# Altium PCB TopBoard.PcbDoc
Units mm, origin at the board's own origin, x right, y up, seen from the top; angles counter-clockwise.
Board outline 100 x 80 mm, 4 copper layers (Top Layer, Internal Plane 1, Internal Plane 2, Bottom Layer); 27 components, 153 nets, 226 pads, 28 vias.
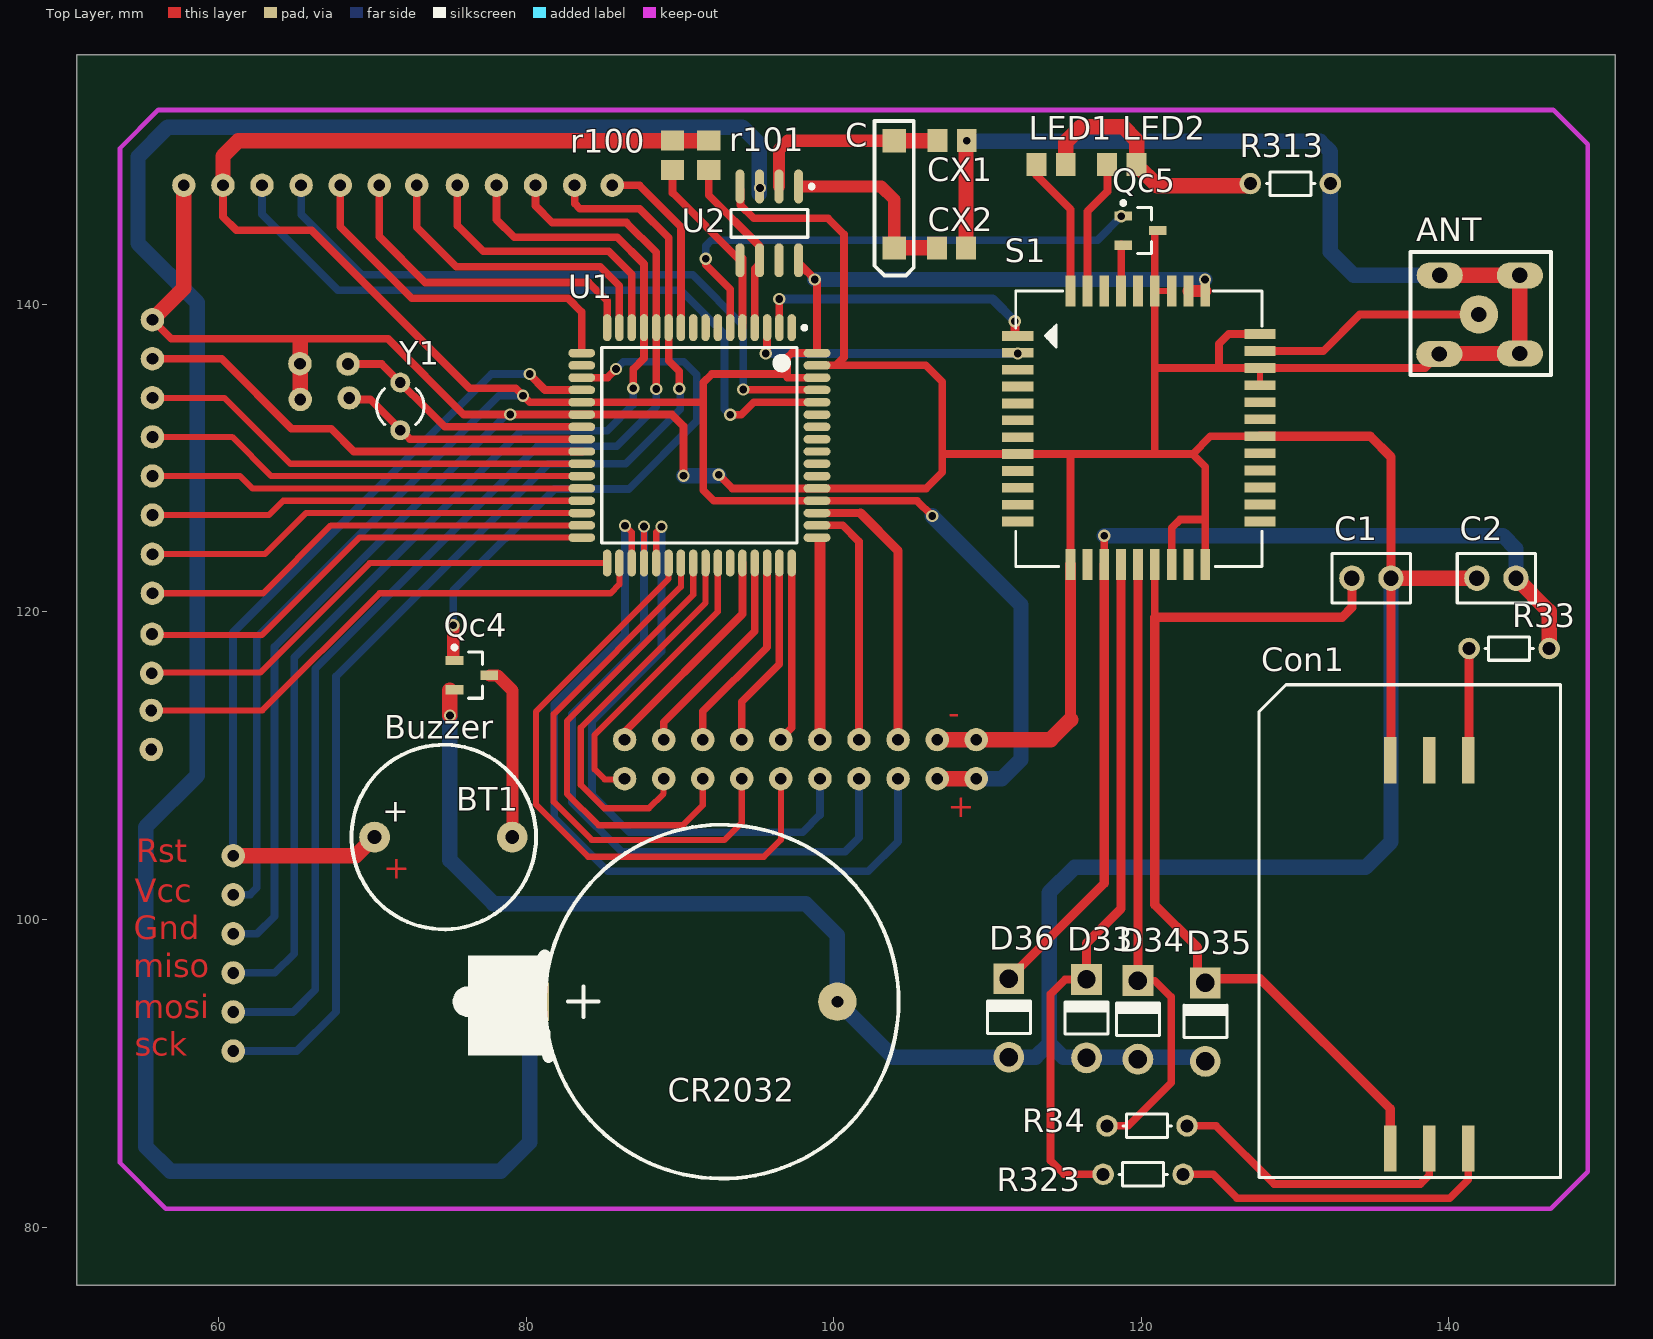
[diagram p0: Top Layer view]
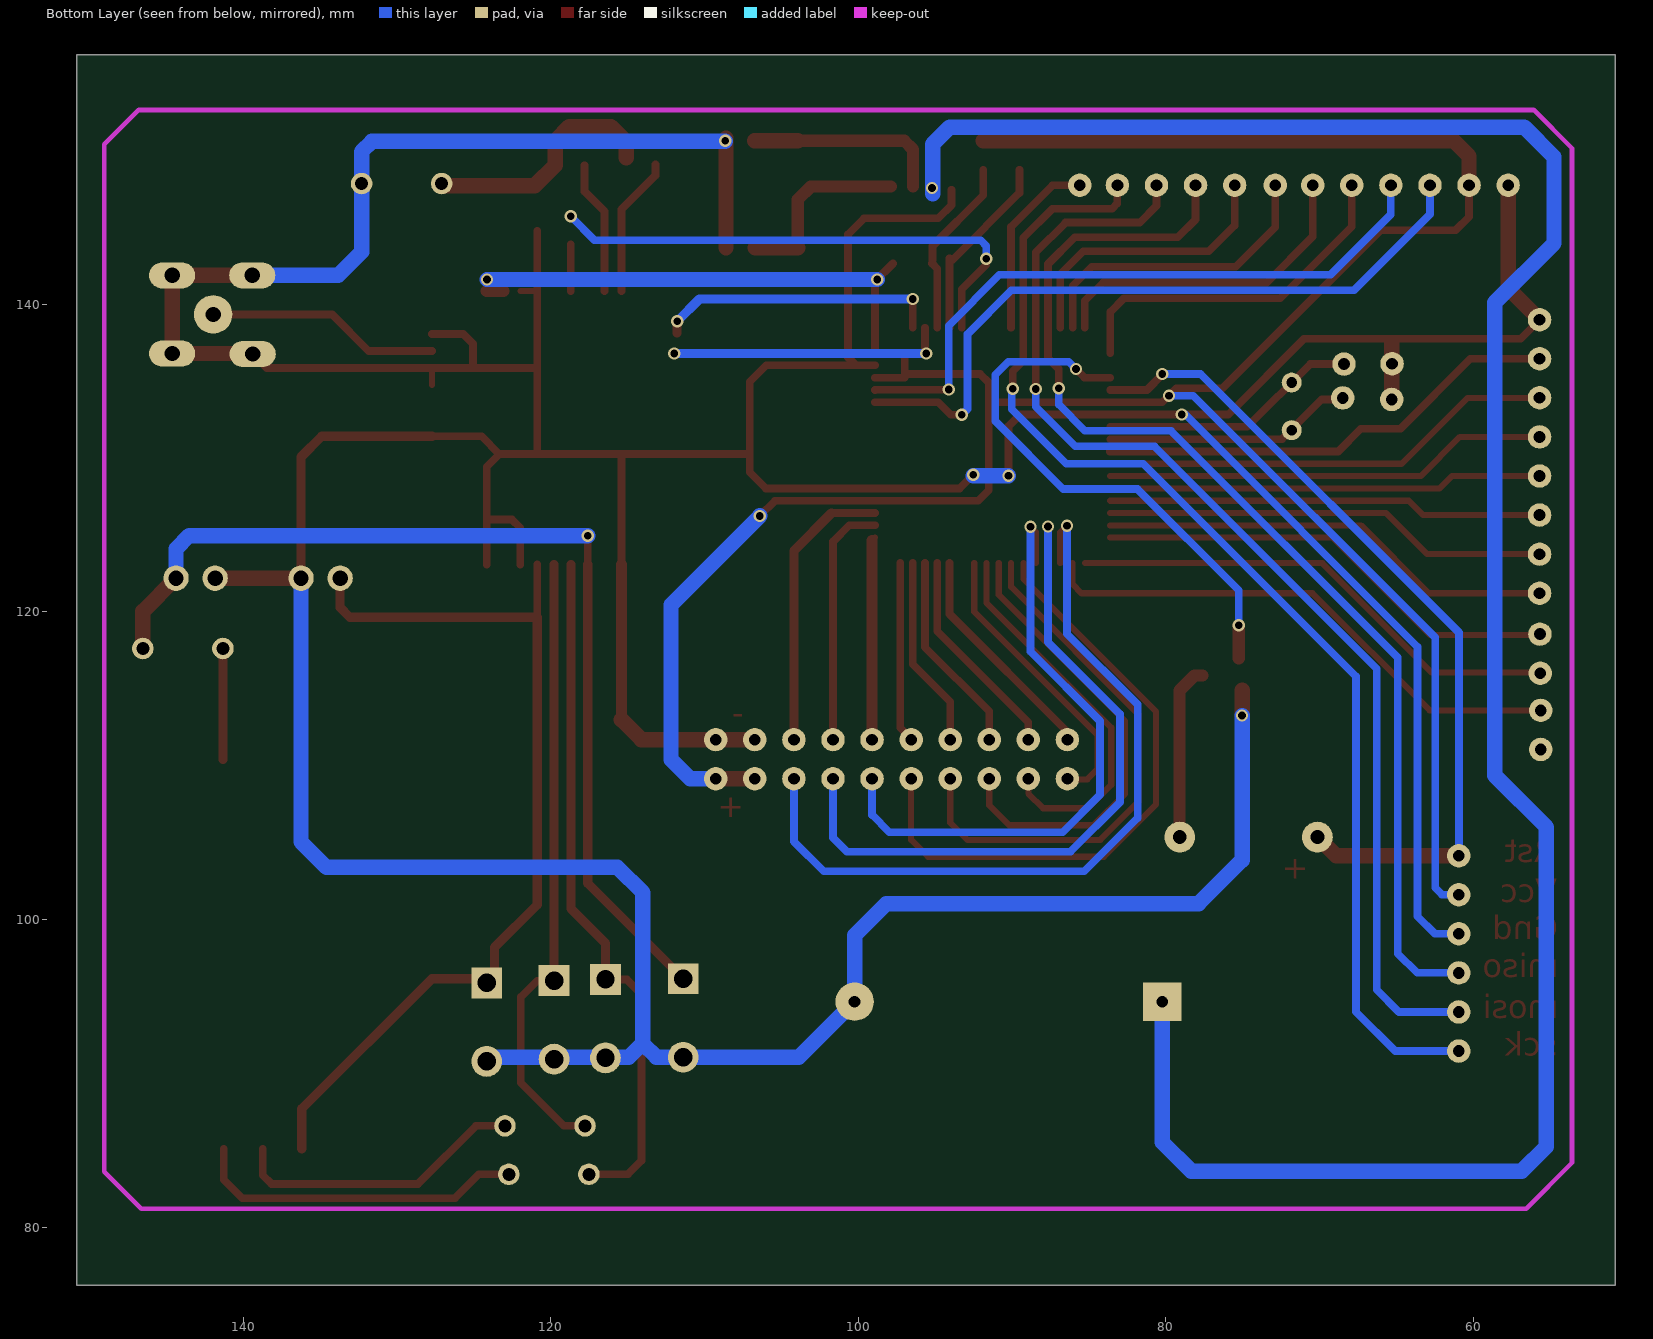
[diagram p1: Bottom Layer view, seen from below]
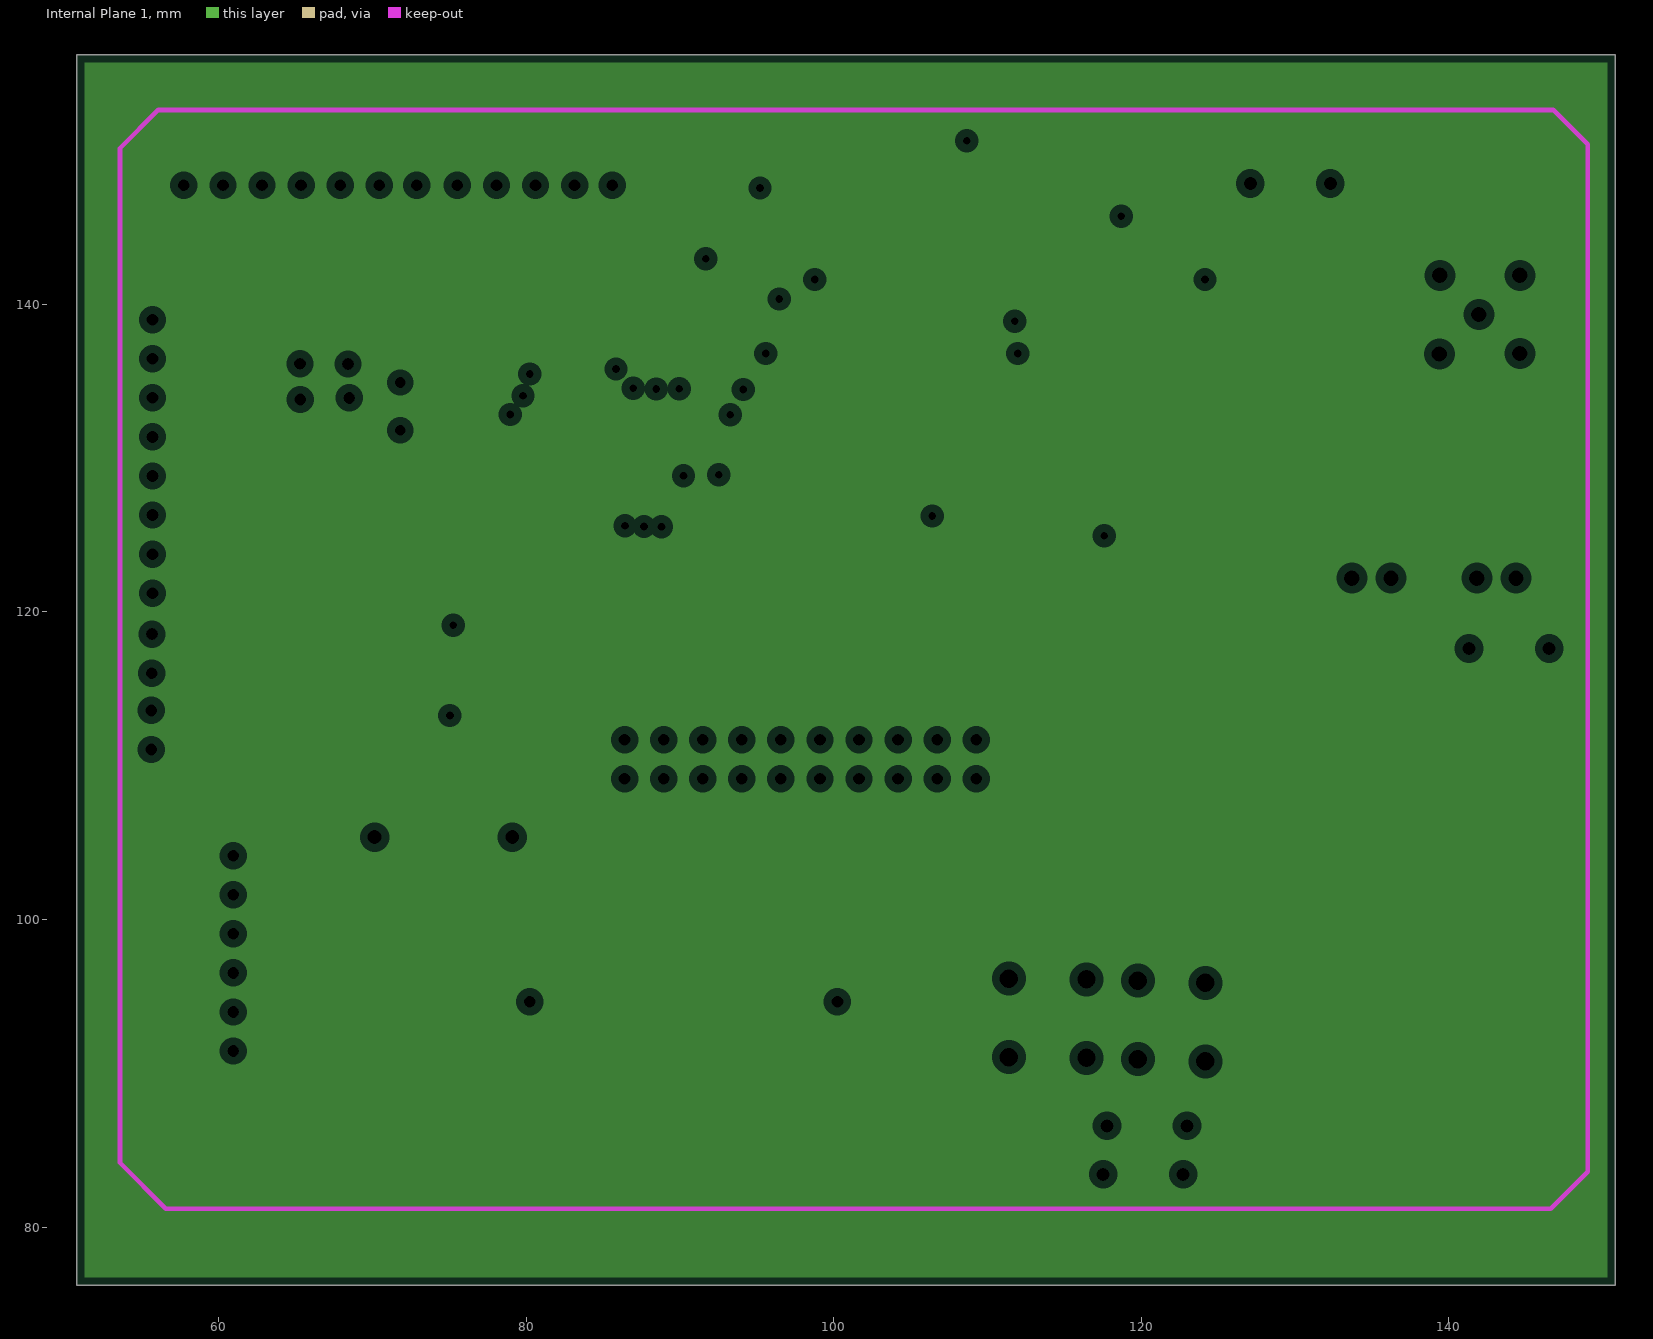
[diagram p2: Internal Plane 1, clearances drawn from the general rule]
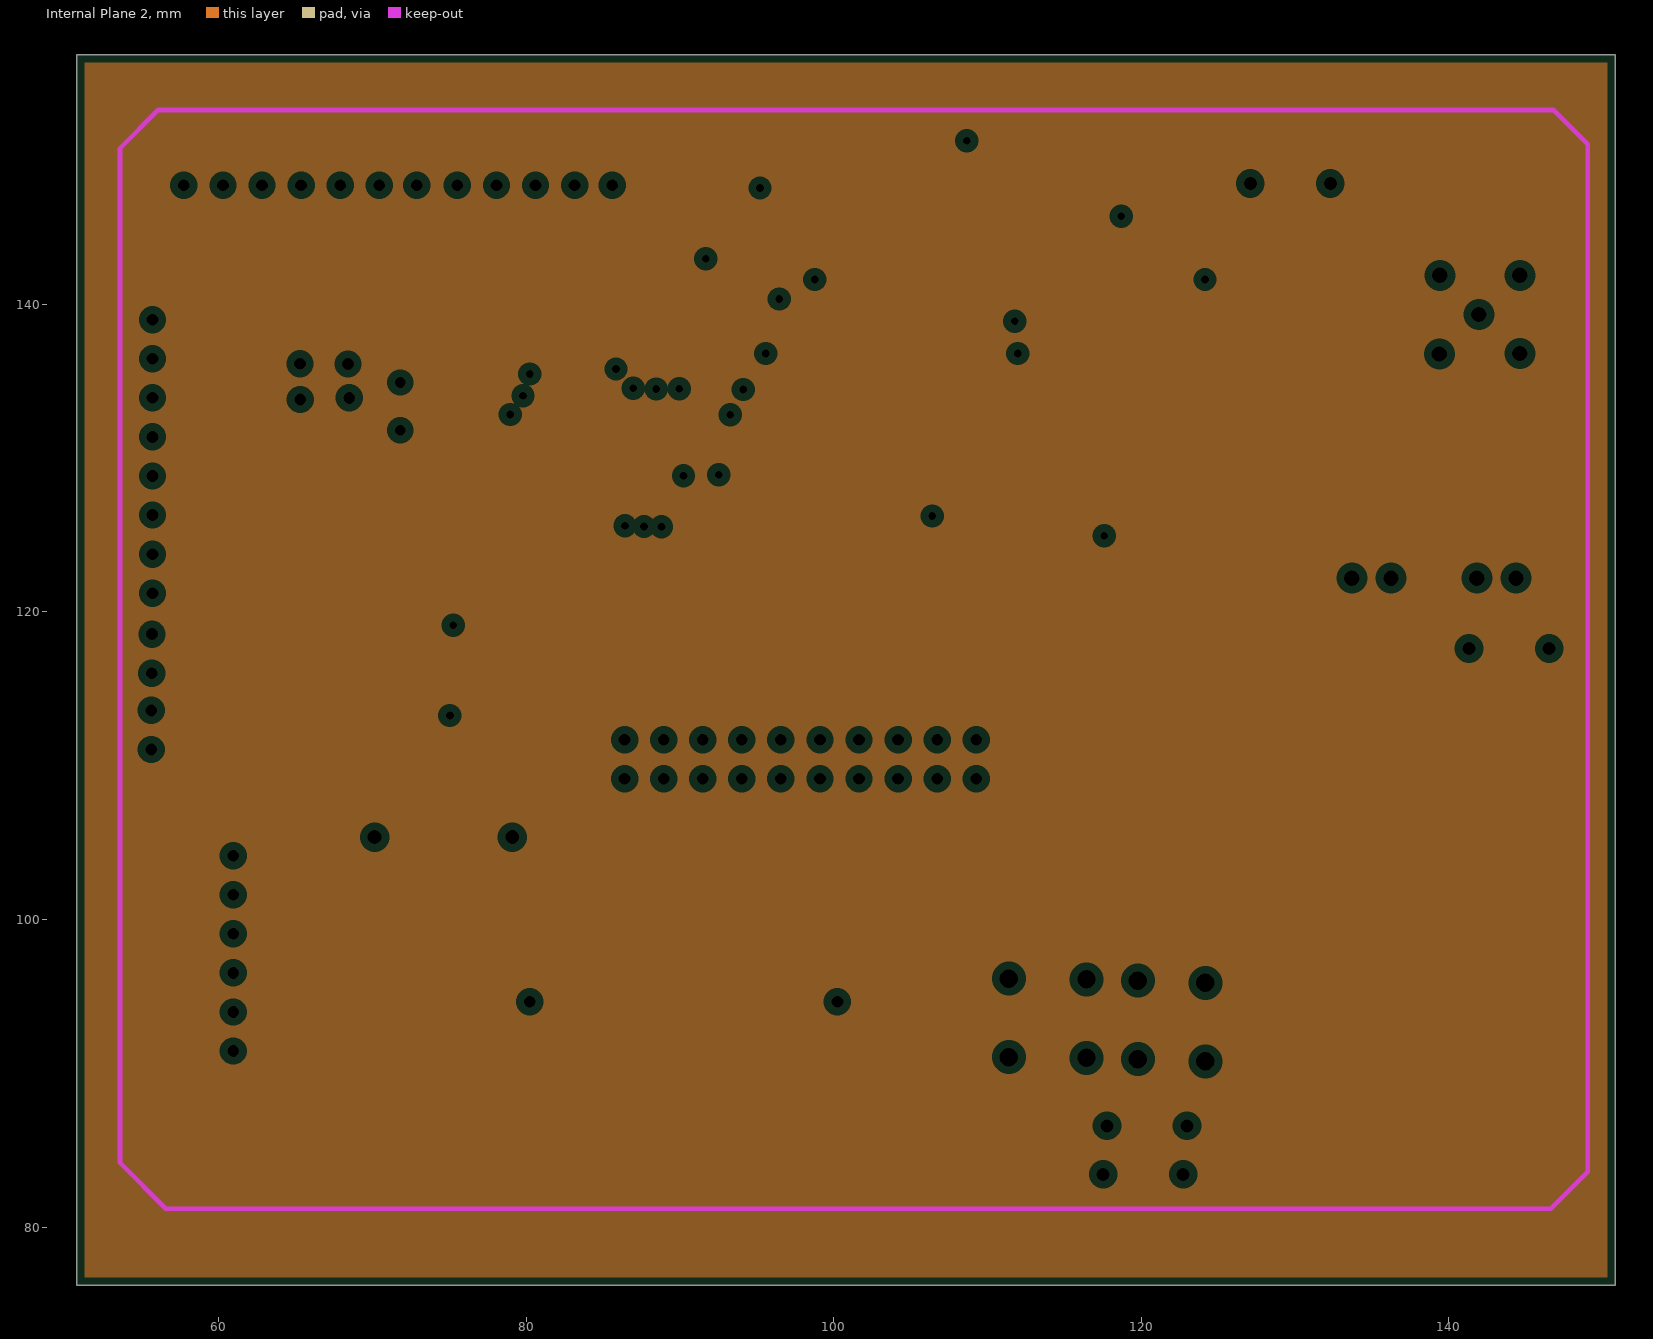
[diagram p3: Internal Plane 2, clearances drawn from the general rule]

## Layer stack, top to bottom
Top Solder: solder mask 0.0102, Solder Resist, Dk 3.5
Top Layer: signal copper 0.0356
Dielectric1: dielectric 0.32, FR-4, Dk 4.8
Internal Plane 1: plane copper 0.0356
Dielectric2: dielectric 0.32, FR-4, Dk 4.8
Internal Plane 2: plane copper 0.0356
Dielectric3: dielectric 0.32, FR-4, Dk 4.8
Bottom Layer: signal copper 0.0356
Bottom Solder: solder mask 0.0102, Solder Resist, Dk 3.5

## Board outline
50.8,76.2 150.8,76.2 150.8,156.2 50.8,156.2

## Design rules (kind name [scope] priority, off if disabled: settings)
Clearance [All] p1: gap=0.2 ignorepadtopadclearanceinfootprint=FALSE except(0: Arc-Hole Track-Hole SMDPad-Hole THPad-Hole Via-Hole Fill-Hole Poly-Hole Region-Hole Text-Hole)
PlaneClearance [All] p1: clearance=0.508
PlaneConnect [All] p1: planeconnectstyle=Relief reliefexpansion=0.508 reliefentries=4 reliefconductorwidth=0.254 reliefairgap=0.254
PolygonConnect [All] p1: connectstyle=Relief reliefconductorwidth=0.254 reliefentries=4 polygonreliefangle="90 Angle" airgapwidth=0.254
RoutingVias [All] p1: holewidth=0.6 width=1 viastyle="Through Hole" minholewidth=0.711 minwidth=1.27 maxholewidth=0.711 maxwidth=1.27
SilkToSolderMaskClearance SilkscreenOverComponentPads [IsPad] p1: minsilkscreentomaskgap=0.254 clearancetoexposedcopper=TRUE
SolderMaskExpansion [All] p1: expansion=0.102
Width [All] p1: maxlimit=0.2 minlimit=0.2 preferedwidth=0.2
27 further rules are at their usual default settings.

## Classes and differential pairs
component class "Reley Control": Buzzer REL1 REL2 REL3 REL4 REL5 REL6 REL7 REL8 REL9 REL10 U3 U4
component class "Power supply": C3 C21 C22 C23 C24 D1 D2 D3 D4 F1 Reg1 Reg2
component class Keypad&Lcd: LCD PT1 QL1
component class MCU: O

## Components (designator, comment, footprint, x,y, rotation, side; value= is the part's Value field where it differs from the comment)
ANT "Antenna" ANT-R-RF 146.641,151.644 r180 top
BT1 "Battery" CR2032 91.225,94.65 r0 top
Buzzer "Comment" BUZZER 74.65,105.35 r0 top
C "Crystal" Crystal 103.936,150.62 r270 top
C1 "Cap" CAPR2.54-5.1x3.2 134.957,122.18 r0 top
C2 "Cap" CAPR2.54-5.1x3.2 143.085,122.18 r0 top
Con1 "SIM Socket" "sim card holder" 128.861,114.052 r90 top
CX1 "ERA6Y" ERA-0805 107.7,150.625 r180 top (schematic designator R12)
CX2 "ERA6Y" ERA-0805 107.65,143.65 r180 top (schematic designator R12)
D33 "Diode 1N4007 vertical" "D 50mm" 116.436,96.22 r90 top
D34 "Diode 1N4007 vertical" "D 50mm" 119.78,96.145 r90 top
D35 "Diode 1N4007 vertical" "D 50mm" 124.161,95.995 r90 top
D36 "Diode 1N4007 vertical" "D 50mm" 111.386,96.27 r90 top
LED1 "ERA6Y" ERA-0805 114.136,149.075 r180 top (schematic designator R12)
LED2 "ERA6Y" ERA-0805 118.725,149.075 r180 top (schematic designator R12)
Qc4 "Comment" SOT95P240-3N 76.475,115.875 r0 top
Qc5 "Comment" SOT95P240-3N 119.95,144.775 r0 top
R33 "Res3" Res50 145.117,117.608 r0 top
R34 "Res3" Res50 121.575,86.575 r0 top
r100 "ERA6Y" ERA-0805 89.525,149.675 r270 top (schematic designator R12)
r101 "ERA6Y" ERA-0805 91.875,149.675 r270 top (schematic designator R12)
R313 "Res3" Res50 130.893,147.834 r0 top
R323 "Res3" Res50 121.325,83.425 r0 top
S1 "SIM800c" SIM800C 112.097,137.928 r90 top
U1 "ATmega128-16AC" 64A_N 91.269,130.816 r270 top
U2 "DS1307Z" SOIC8N_N 95.811,145.245 r270 top
Y1 "XTAL" BCY-W2/D3.1 71.825,133.35 r0 top

## Footprints (in the part's own frame and the unit in brackets; to place one, negate y for a bottom-side part, rotate by r counter-clockwise, add the part's x,y. Pads: shape width x height; smd on the part's side, far side on the other; paste and mask are expansions set on the pad)
64A_N [mm] "Thin QFP, 64-Leads, Body 14x14mm, Pitch 0.8mm, IPC Medium Density"
  oval 1.75x0.55 smd: 1(-7.65,6) 2(-7.65,5.2) 3(-7.65,4.4) 4(-7.65,3.6) 5(-7.65,2.8) 6(-7.65,2) 7(-7.65,1.2) 8(-7.65,0.4) 9(-7.65,-0.4) 10(-7.65,-1.2) 11(-7.65,-2) 12(-7.65,-2.8) 13(-7.65,-3.6) 14(-7.65,-4.4) 15(-7.65,-5.2) 16(-7.65,-6) 33(7.65,-6) 34(7.65,-5.2) 35(7.65,-4.4) 36(7.65,-3.6) 37(7.65,-2.8) 38(7.65,-2) 39(7.65,-1.2) 40(7.65,-0.4) 41(7.65,0.4) 42(7.65,1.2) 43(7.65,2) 44(7.65,2.8) 45(7.65,3.6) 46(7.65,4.4) 47(7.65,5.2) 48(7.65,6)
  oval 0.55x1.75 smd: 17(-6,-7.65) 18(-5.2,-7.65) 19(-4.4,-7.65) 20(-3.6,-7.65) 21(-2.8,-7.65) 22(-2,-7.65) 23(-1.2,-7.65) 24(-0.4,-7.65) 25(0.4,-7.65) 26(1.2,-7.65) 27(2,-7.65) 28(2.8,-7.65) 29(3.6,-7.65) 30(4.4,-7.65) 31(5.2,-7.65) 32(6,-7.65) 49(6,7.65) 50(5.2,7.65) 51(4.4,7.65) 52(3.6,7.65) 53(2.8,7.65) 54(2,7.65) 55(1.2,7.65) 56(0.4,7.65) 57(-0.4,7.65) 58(-1.2,7.65) 59(-2,7.65) 60(-2.8,7.65) 61(-3.6,7.65) 62(-4.4,7.65) 63(-5.2,7.65) 64(-6,7.65)
  silkscreen extent -7.77,-6.35 6.35,6.95, body extent -7,-7 7,7, height 1.2
ANT-R-RF [mm] "Antenna; Right; RF;"
  oval 3x1.7 hole 1: 1(2.032,14.859) 1(2.032,9.779) 1(7.239,9.779) 1(7.27,14.89)
  round 2.5 hole 1: 2(4.699,12.319)
  silkscreen extent 0,8.25 9.14,16.26
BCY-W2/D3.1 [mm] "Crystal, Thru-Hole; 2 Leads; Body 3.1 x 8.2 mm (Dia.xH)"
  round 1.3 hole 0.7: 1(0,1.55) 2(0,-1.55)
  silkscreen extent -1.55,-1.19 1.55,1.17
BUZZER [mm] "BUZZER"
  round 2 hole 0.9: 1(-4.5,0) 2(4.45,0)
  silkscreen extent -6,-6 6,6
CAPR2.54-5.1x3.2 [mm] "Capacitor, Ceramic, Thru-Hole, Dipped Radial; Body 5.1 x 3.2 mm (WxT) Pin Spacing 2.54 mm (typ)"
  round 1.65 hole 1: 1(-1.27,0) 2(1.27,0)
  silkscreen extent -2.55,-1.6 2.55,1.6
CR2032 [mm] "Battery holder"
  rect 2.5x2.5 hole 0.762: 0(-10.983,0)
  round 2.5 hole 0.762: 1(9.017,0)
  silkscreen extent -15.5,-11.5 13,11.5
Crystal [mm] "6.867"
  rect 1.5x1.5 smd: 0(6.985,0) 1(0,0)
  silkscreen extent -1.27,-1.27 8.76,1.27
"D 50mm" [mm] "50mm Pin Spacing"
  round 2 hole 1.2: 1(-5.23,0)
  rect 2x2 hole 1.2: 2(-0.127,0)
  silkscreen extent -3.68,-1.4 -1.49,1.4
ERA-0805 [mm] "Chip Resistor; Body 2 x 1.3 mm (LxW typ)"
  rect 1.3x1.5 smd: 1(-0.95,0) 2(0.95,0)
Res50 [mm] "50mm Pin Spacing"
  round 1.4 hole 0.85: 1(-3.81,0) 2(1.397,0)
  silkscreen extent -2.77,-0.76 0.38,0.76
SIM800C [mil]
  rect 25x80 smd: 0(0,5) 1(-43.18,5) 2(-86.36,5) 3(-129.55,5) 4(-172.73,5) 5(-215.91,5) 6(-259.09,5) 7(-302.27,5) 8(-345.45,5) 9(-388.64,5) 10(-431.82,5) 11(-475,5) 21(-475,-615) 22(-431.36,-615) 23(-387.73,-615) 24(-344.09,-615) 25(-300.45,-615) 26(-256.82,-615) 27(-213.18,-615) 28(-169.55,-615) 29(-125.91,-615) 30(-82.27,-615) 31(-38.64,-615) 32(5,-615)
  rect 80x25 smd: 12(-585,-130) 13(-585,-173.13) 14(-585,-216.25) 15(-585,-259.38) 16(-585,-302.5) 17(-585,-345.63) 18(-585,-388.75) 19(-585,-431.88) 20(-585,-475) 33(115,-475) 34(115,-431.88) 35(115,-388.75) 36(115,-345.63) 37(115,-302.5) 38(115,-259.38) 39(115,-216.25) 40(115,-173.13) 41(115,-130)
  silkscreen extent -590,-620 115,10, body extent -583,-613 110,5, height 88
"sim card holder" [mm]
  rect 3x0.8 smd: 1(-28.959,-12.395) 2(-28.959,-9.855) 3(-28.959,-7.315) 4(-3.708,-12.395) 5(-3.708,-9.855) 6(-3.708,-7.315)
  silkscreen extent -30.84,-18.4 1.2,1.2, body extent -29.64,-17.2 0,0, height 2.6
SOIC8N_N [mm] "SOIC, 8-Leads, Body 4.9x3.9mm, Pitch 1.27mm, IPC Medium Density"
  oval 2.2x0.6 smd: 1(-2.4,1.905) 2(-2.4,0.635) 3(-2.4,-0.635) 4(-2.4,-1.905) 5(2.4,-1.905) 6(2.4,-0.635) 7(2.4,0.635) 8(2.4,1.905)
  silkscreen extent -2.52,-2.5 0.9,2.88, body extent -2,-2.5 2,2.5, height 1.75
SOT95P240-3N [mm] "SOT23, 3-Leads, Body 2.9x1.3mm, Pitch 0.95mm, Lead Span 2.4mm, IPC Medium Density"
  rect 1.15x0.6 smd: 1(-1.125,0.95) 2(-1.125,-0.95) 3(1.125,0)
  silkscreen extent -1.25,-1.5 0.7,1.92, body extent -0.7,-1.5 0.7,1.5, height 1.14

## Part data
ANT: "Right RF Antenna"
BT1: library part "Battery holder", "Battery holder CR2032"
C1 C2: "Capacitor"
Con1 S1: library part Component_1
CX1 CX2 LED1 LED2 r100 r101: "Rectangular Thick Film Chip Resistor, 10 Ohm to 1M Ohm Range, 0.1% and 0.5% Tolerance, 0805 Size, 0.1 W"
D33 D34 D35 D36: "1 Amp General Purpose Rectifier"
R33 R34 R313 R323: "Resistor"
U1: "8-Bit AVR Microcontroller with 128K Bytes of In-System Programmable Flash Memory"
U2: "64 X 8 Serial Real-Time Clock"
Y1: "Crystal Oscillator"

## Free pads (board coordinates)
  round 1.524 hole 0.762: 0(55.711,138.985) 0(57.756,147.73) 0(60.296,147.73) 0(62.836,147.73) 0(65.3,136.125) 0(65.325,133.8) 0(65.376,147.73) 0(68.425,136.1) 0(68.5,133.9) 0(75.536,147.73) 1(55.711,136.445) 1(65.376,147.73) 1(78.076,147.73) 2(55.711,133.905) 2(67.916,147.73) 2(80.616,147.73) 3(55.711,131.365) 3(70.456,147.73) 3(83.156,147.73) 4(55.711,128.825) 4(72.896,147.73) 4(85.596,147.73) 5(55.711,126.285) 6(55.711,123.745) 7(55.711,121.205) 8(55.661,115.995) 8(55.686,118.545) 10(55.636,113.585) 11(55.636,111.045) 11(86.406,111.685) 12(86.406,109.145) 13(88.946,109.145) 14(88.946,111.685) 15(91.486,111.685) 16(91.486,109.145) 17(94.026,109.145) 18(94.026,111.685) 19(96.566,111.685) 20(96.566,109.145) 21(99.106,109.145) 22(99.106,111.685) 23(101.646,111.685) 24(101.646,109.145) 25(104.186,109.145) 26(104.186,111.685) 27(106.726,109.145) 28(106.726,111.685) 29(109.266,111.685) 30(109.266,109.145) 31(60.96,101.6) 32(60.96,99.06) 33(60.96,96.52) 34(60.96,104.14) 35(60.96,93.98) 36(60.96,91.44)

## Via types
v1: diameter 0.8, hole 0.5, Top Layer to Bottom Layer, 28 vias

## Nets (pads, with @x,y where several pads share a name; then routed paths per layer and width w, separated by ;. In a path a pad name is that pad's centre, name@x,y a point inside that pad or via, vN(x,y) a via of type N, cw(c..) or ccw(c..) an arc to the next point about the centre after c; other vN are vias at no path point)
NetANT_1: 
NetANT_2: 
NetBT1_0: 
NetBuzzer_1: 
NetBuzzer_2: 
NetC1_1: 
NetC2_2: 
NetC3_1: 
NetC23_1: 
NetC_0: 
NetC_1: 
NetCon1_1: 
NetCon1_2: 
NetCon1_4: 
NetD1_1: 
NetD1_2: 
NetD2_1: 
NetD2_2: 
NetD3_1: 
NetD3_2: 
NetD4_1: 
NetD4_2: 
NetD5_1: 
NetD5_2: 
NetD6_1: 
NetD6_2: 
NetD7_1: 
NetD7_2: 
NetD8_1: 
NetD8_2: 
NetD9_1: 
NetD9_2: 
NetD10_1: 
NetD10_2: 
NetD11_1: 
NetD11_2: 
NetD12_1: 
NetD12_2: 
NetD13_1: 
NetD13_2: 
NetD14_1: 
NetD14_2: 
NetD15_1: 
NetD15_2: 
NetD16_1: 
NetD16_2: 
NetD17_1: 
NetD17_2: 
NetD18_1: 
NetD18_2: 
NetD19_1: 
NetD19_2: 
NetD20_1: 
NetD20_2: 
NetD21_1: 
NetD21_2: 
NetD22_1: 
NetD22_2: 
NetD23_1: 
NetD23_2: 
NetD24_1: 
NetD24_2: 
NetD25_1: 
NetD25_2: 
NetD26_1: 
NetD26_2: 
NetD27_1: 
NetD27_2: 
NetD28_1: 
NetD28_2: 
NetD29_1: 
NetD29_2: 
NetD30_1: 
NetD30_2: 
NetD31_1: 
NetD31_2: 
NetD32_1: 
NetD32_2: 
NetD33_2: 
NetD34_2: 
NetLCD_0: 
NetLCD_1: 
NetLCD_2: 
NetLCD_3: 
NetLCD_4: 
NetLCD_5: 
NetLCD_10: 
NetLCD_11: 
NetLCD_12: 
NetLCD_13: 
NetLCD_15: 
NetLED1_1: 
NetLED1_2: 
NetLED2_1: 
NetM1_1: 
NetM1_2: 
NetM1_3: 
NetM1_4: 
NetM1_5: 
NetM1_6: 
NetM1_7: 
NetM1_8: 
NetM1_15: 
NetM1_16: 
NetM1_17: 
NetM1_18: 
NetM1_19: 
NetM1_20: 
NetM1_21: 
NetM1_22: 
NetM2_1: 
NetM2_2: 
NetM2_3: 
NetM2_4: 
NetM2_5: 
NetM2_6: 
NetM2_7: 
NetM2_8: 
NetM2_15: 
NetM2_16: 
NetM2_17: 
NetM2_18: 
NetM2_19: 
NetM2_20: 
NetM2_21: 
NetM2_22: 
NetQL1_B: 
NetREL1_2: 
NetREL2_2: 
NetREL3_2: 
NetREL4_2: 
NetREL5_2: 
NetREL6_2: 
NetREL7_2: 
NetREL8_2: 
NetREL9_2: 
NetREL10_2: 
NetS1_0: 
NetS1_1: 
NetU1_4: 
NetU1_19: 
NetU1_23: 
NetU1_24: 
NetU1_25: 
NetU1_26: 
NetU1_27: 
NetU1_28: 
NetU1_29: 
NetU1_30: 
NetU1_31: 
NetU1_32: 
NetU1_33: 
NetU1_34: 
pads on no net: ANT.1 ANT.2 BT1.0 BT1.1 Buzzer.1 Buzzer.2 C1.1 C1.2 C2.1 C2.2 C.0 C.1 Con1.1 Con1.2 Con1.3 Con1.4 Con1.5 Con1.6 CX1.1 CX1.2 CX2.1 CX2.2 D33.1 D33.2 D34.1 D34.2 D35.1 D35.2 D36.1 D36.2 LED1.1 LED1.2 LED2.1 LED2.2 Qc4.1 Qc4.2 Qc4.3 Qc5.1 Qc5.2 Qc5.3 R33.1 R33.2 R34.1 R34.2 r100.1 r100.2 r101.1 r101.2 R313.1 R313.2 R323.1 R323.2 S1.0 S1.1 S1.2 S1.3 S1.4 S1.5 S1.6 S1.7 S1.8 S1.9 S1.10 S1.11 S1.12 S1.13 S1.14 S1.15 S1.16 S1.17 S1.18 S1.19 S1.20 S1.21 S1.22 S1.23 S1.24 S1.25 S1.26 S1.27 S1.28 S1.29 S1.30 S1.31 S1.32 S1.33 S1.34 S1.35 S1.36 S1.37 S1.38 S1.39 S1.40 S1.41 U1.1 U1.2 U1.3 U1.4 U1.5 U1.6 U1.7 U1.8 U1.9 U1.10 U1.11 U1.12 U1.13 U1.14 U1.15 U1.16 U1.17 U1.18 U1.19 U1.20 U1.21 U1.22 U1.23 U1.24 U1.25 U1.26 U1.27 U1.28 U1.29 U1.30 U1.31 U1.32 U1.33 U1.34 U1.35 U1.36 U1.37 U1.38 U1.39 U1.40 U1.41 U1.42 U1.43 U1.44 U1.45 U1.46 U1.47 U1.48 U1.49 U1.50 U1.51 U1.52 U1.53 U1.54 U1.55 U1.56 U1.57 U1.58 U1.59 U1.60 U1.61 U1.62 U1.63 U1.64 U2.1 U2.2 U2.3 U2.4 U2.5 U2.6 U2.7 U2.8 Y1.1 Y1.2
copper on no net: | length 2502.2
  Top Layer w0.2: 83.551,130.348 83.619,130.416
  Top Layer w0.4: 55.311,116.045 62.72,116.045 69.841,123.166 85.269,123.166 ; 55.636,113.585 62.86,113.585 70.475,121.2 85.491,121.2 86.069,121.778 86.069,123.166 ; 55.711,118.665 55.881,118.495 62.845,118.495 69.166,124.816 83.619,124.816 ; 55.711,121.205 62.905,121.205 67.316,125.616 83.619,125.616 ; 55.711,123.745 63.02,123.745 65.691,126.416 83.619,126.416 ; 55.711,126.285 63.285,126.285 64.216,127.216 83.619,127.216 ; 55.711,128.825 61.4,128.825 62.209,128.016 83.619,128.016 ; 55.711,131.365 60.885,131.365 63.434,128.816 83.619,128.816 ; 55.711,133.905 60.395,133.905 64.68,129.62 83.599,129.62 ; 86.406,111.685 86.406,112.19 ; v1(86.436,125.595) 86.869,125.162 86.869,123.166 ; 86.636,109.095 85.111,109.095 84.461,109.745 84.461,111.995 92.461,119.995 92.461,123.166 ; 87.669,123.166 v1(87.669,125.545) ; 88.469,123.166 88.469,125.178 v1(88.811,125.52) ; 88.946,109.145 88.946,108.18 87.986,107.22 85.086,107.22 83.561,108.745 83.561,112.47 91.669,120.578 91.669,123.166 ; 89.269,123.166 89.269,122.128 80.636,113.495 80.636,107.47 84.036,104.07 95.461,104.07 96.566,105.175 96.566,109.145 ; 90.069,123.166 90.069,121.628 81.786,113.345 81.786,107.645 84.261,105.17 92.911,105.17 94.026,106.285 94.026,109.145 ; 90.869,123.166 90.869,121.103 82.661,112.895 82.661,108.17 84.711,106.12 90.186,106.12 91.486,107.42 91.486,109.145 ; 98.919,124.816 99.106,124.629 ; 120.876,140.849 121.971,140.849 ; 127.718,134.73 127.718,135.838
  Top Layer w0.5: 55.711,136.445 60.205,136.445 64.75,131.9 67.325,131.9 68.807,130.418 83.656,130.418 ; 55.711,138.985 56.946,137.75 63.375,137.75 71.025,137.75 75.959,132.816 78.034,132.816 83.619,132.816 89.49,132.816 90.236,132.07 v1(90.236,128.845) ; 60.296,147.73 60.296,145.679 61.175,144.8 66.05,144.8 76.325,134.525 79.325,134.525 80.234,133.616 83.619,133.616 91.529,133.616 ; 67.916,147.73 67.916,145.034 72.575,140.375 82.725,140.375 83.619,139.481 83.619,136.816 ; 68.425,136.1 70.625,136.1 74.709,132.016 83.619,132.016 ; 68.675,133.8 69.875,133.8 72.459,131.216 83.619,131.216 ; 70.456,147.73 70.456,144.394 73.45,141.4 84.075,141.4 85.269,140.206 85.269,138.466 ; 72.896,147.73 72.896,145.004 75.475,142.425 84.825,142.425 86.069,141.181 86.069,138.466 ; 75.536,147.73 75.536,145.114 77.225,143.425 85.375,143.425 86.869,141.931 86.869,138.466 ; 78.076,147.73 78.076,145.499 79.225,144.35 85.925,144.35 87.669,142.606 87.669,138.466 87.669,136.469 86.975,135.775 v1(86.975,134.525) ; v1@80.225,135.425 81.234,134.416 83.619,134.416 ; 80.616,147.73 80.616,146.384 81.7,145.3 86.525,145.3 88.469,143.356 88.469,138.466 v1(88.469,134.475) ; 83.156,147.73 83.156,146.544 83.5,146.2 87.375,146.2 89.269,144.306 89.269,138.466 89.269,136.306 89.95,135.625 v1(89.95,134.5) ; 83.619,135.216 85.291,135.216 v1(85.85,135.775) ; 85.596,147.73 87.37,147.73 90.069,145.031 90.069,138.466 ; 86.406,112.19 94.069,119.853 94.069,123.166 ; 88.946,111.685 88.946,112.805 94.869,118.728 94.869,123.166 ; 89.525,148.725 89.525,147.226 93.906,142.845 ; 91.486,111.685 91.486,113.52 95.669,117.703 95.669,123.166 ; v1(91.675,142.95) 91.675,142.55 93.269,140.956 93.269,138.466 ; 91.875,148.725 91.875,147.075 95.176,143.774 95.176,142.845 ; v1(92.536,128.895) 93.415,128.016 98.919,128.016 106.016,128.016 107.061,129.061 107.061,134.939 105.984,136.016 100.152,136.016 ; v1(93.275,132.8) 94,132.8 94.816,133.616 98.919,133.616 ; 93.936,147.44 93.936,146.439 94.8,145.575 99.624,145.575 100.667,144.532 100.667,136.531 100.152,136.016 ; 94.026,111.685 94.026,114.151 96.469,116.594 96.469,123.166 ; 94.069,138.466 94.069,142.975 ; v1(94.125,134.45) 98.919,134.416 ; 94.869,138.466 94.869,142.303 95.206,142.64 ; v1@95.669,136.785 95.669,138.466 ; 96.469,138.466 v1(96.469,140.334) ; 96.534,111.718 97.269,112.453 97.269,123.166 ; 96.984,135.216 98.919,135.216 ; 97.746,142.64 98.919,141.467 98.919,136.816 97.269,136.816 96.984,136.531 96.984,135.45 92.075,135.45 91.529,134.904 91.529,133.616 ; 98.919,125.616 100.59,125.616 101.646,124.56 101.646,111.685 ; 98.919,126.416 101.74,126.416 ; 98.919,136.016 100.152,136.016 ; v1(106.4,126.227) 105.411,127.216 98.919,127.216 92.202,127.216 91.529,127.889 91.529,133.616 ; 107.061,130.25 111.97,130.25 115.399,130.25 ; 113.186,149.075 113.186,148.364 115.399,146.151 115.399,140.849 ; 115.399,123.069 115.399,130.25 ; 116.436,96.093 115.043,96.093 114.1,95.15 114.1,84.3 114.975,83.425 117.515,83.425 ; 116.494,140.849 116.494,146.019 117.8,147.325 117.8,149.03 ; 117.59,123.069 v1(117.59,124.942) ; 117.765,86.575 119.15,86.575 121.95,89.375 121.95,94.95 120.882,96.018 119.78,96.018 ; 118.685,140.849 118.685,143.875 ; 120.876,119.64 120.876,123.069 ; 120.876,130.266 120.876,140.849 120.876,144.775 ; 120.945,135.838 125.051,135.838 ; 121.971,123.069 121.971,125.45 122.511,125.99 124.162,125.99 ; 122.722,83.425 124.675,83.425 126.225,81.875 140.05,81.875 141.256,83.081 141.256,85.093 ; 122.972,86.575 124.85,86.575 128.625,82.8 138.15,82.8 138.716,83.366 138.716,85.093 ; 124.162,123.069 124.162,125.99 ; 127.718,131.405 124.485,131.405 123.331,130.25 ; 127.718,136.947 131.817,136.947 134.195,139.325 141.942,139.325 ; 127.718,138.055 125.686,138.055 125.051,137.42 125.051,135.838 ; 139.402,136.785 138.455,135.838 127.718,135.838 125.051,135.838 ; 115.399,130.25 123.331,130.25 ; 123.331,130.25 124.162,129.419 124.162,125.99
  Top Layer w0.6: 101.74,126.416 104.186,123.97 104.186,111.685 ; 111.386,96.143 117.59,102.347 117.59,123.069 ; 111.779,138.119 v1(111.779,138.881) ; 116.436,96.093 116.436,98.452 118.685,100.701 118.685,123.069 ; 119.78,96.145 119.78,123.069 ; 123.654,96.018 123.654,98.177 120.876,100.955 120.876,119.64 133.052,119.64 133.687,120.275 133.687,122.18 ; 123.781,96.145 127.718,96.145 136.176,87.687 136.176,85.093 ; 127.718,131.405 134.876,131.405 136.227,130.054 136.227,122.18 136.227,110.395 ; 141.307,110.395 141.307,117.608
  Top Layer w0.7: 99.106,111.685 99.106,124.629 ; 115.399,112.983 115.399,123.069
  Top Layer w0.8: 75.275,116.975 v1(75.275,119.125) ; 77.625,115.85 78.15,115.85 79.125,114.875 79.125,105.35 ; 96.446,147.645 96.446,150.055 97.011,150.62 103.936,150.62 ; 97.886,147.645 103.086,147.645 103.936,146.795 103.936,143.635 ; 123.067,140.849 124.162,140.849
  Top Layer w1: 55.711,138.985 57.756,141.03 57.756,147.73 ; 60.296,147.73 60.296,149.621 61.3,150.625 91.875,150.625 ; 60.96,104.14 68.94,104.14 70.15,105.35 ; 65.325,133.8 65.325,137.5 ; v1(75.05,113.25) 75.05,114.9 ; 103.936,143.65 106.7,143.65 ; 103.936,150.625 106.75,150.625 ; 106.726,109.145 109.266,109.145 ; 106.726,111.685 109.266,111.685 ; 108.6,143.65 v1@108.6,150.8 ; 109.036,111.685 114.101,111.685 115.399,112.983 ; 115.086,149.505 115.086,150.541 116.075,151.53 118.8,151.53 119.7,150.63 119.7,149.03 121.035,147.695 126.944,147.695 ; 136.227,122.18 141.815,122.18 ; 139.402,136.785 144.609,136.785 144.609,141.865 139.402,141.865 ; 144.355,122.18 146.514,120.021 146.514,117.608
  Bottom Layer w0.5: 60.95,104.14 60.95,118.65 77.75,135.45 v1(80.25,135.45) ; 60.96,91.44 65.09,91.44 67.65,94 67.65,107.8 67.65,115.8 81.475,129.625 86.475,129.625 90.025,133.175 90.025,134.35 v1@89.875,134.5 ; 60.96,93.98 64.855,93.98 66.3,95.425 66.3,107.3 66.3,116.3 80.75,130.75 85.9,130.75 88.469,133.319 v1(88.469,134.475) ; 60.96,96.52 63.67,96.52 64.925,97.775 64.925,106.45 64.925,117.025 79.675,131.775 85.275,131.775 86.975,133.475 v1(86.975,134.525) ; 60.96,99.06 62.51,99.06 63.65,100.2 63.65,105.825 63.65,117.725 78.75,132.825 v1(78.975,132.825) ; 60.96,101.6 62.05,101.6 62.5,102.05 62.5,105.2 62.5,118.325 78.225,134.05 v1(79.8,134.05) ; 62.836,147.73 62.836,145.839 67.775,140.9 90.05,140.9 92.9,138.05 92.9,133.175 v1(93.275,132.8) ; 65.376,147.73 65.376,145.824 69.3,141.9 90.825,141.9 94.125,138.6 v1(94.125,134.45) ; v1(75.275,119.125) 75.275,121.4 81.85,127.975 86.675,127.975 91.1,132.4 91.1,135.4 90.25,136.25 86.325,136.25 v1(85.85,135.775) ; v1(86.436,125.595) 86.436,118.57 81.836,113.97 81.836,106.595 85.311,103.12 102.245,103.12 104.186,105.061 104.186,109.145 ; v1(87.669,125.545) 87.669,118.028 82.986,113.345 82.986,107.62 86.211,104.395 100.736,104.395 101.646,105.305 101.646,109.145 ; v1(88.811,125.52) 88.811,117.42 84.286,112.895 84.286,108.095 86.711,105.67 97.986,105.67 99.106,106.79 99.106,109.145 ; v1(91.675,142.95) 91.675,143.775 92.05,144.15 117.15,144.15 v1(118.7,145.7)
  Bottom Layer w0.6: v1(95.587,136.785) v1(111.97,136.785) ; v1(96.469,140.334) 110.326,140.334 v1(111.779,138.881)
  Bottom Layer w1: v1(75.05,113.25) 75.05,103.85 77.875,101.025 98.175,101.025 100.225,98.975 100.225,94.681 103.866,91.04 113.131,91.04 114.002,91.911 ; 80.242,94.65 80.242,85.517 78.35,83.625 56.875,83.625 55.275,85.225 55.275,106 58.625,109.35 58.625,135.9 58.625,140.1 54.775,143.95 54.775,149.575 56.695,151.495 94.061,151.495 95.161,150.395 v1@95.161,147.17 ; v1(90.236,128.845) v1@92.536,128.845 ; v1(98.761,141.595) v1(124.136,141.595) ; v1(106.4,126.227) 112.175,120.452 112.175,110.384 110.936,109.145 109.266,109.145 ; v1@108.65,150.575 131.625,150.575 132.29,149.91 132.29,143.389 133.814,141.865 139.402,141.865 ; v1(117.59,124.942) 143.498,124.942 144.355,124.085 144.355,122.18 ; 123.781,91.042 114.914,91.042 114.002,91.954 114.002,101.733 115.653,103.384 134.576,103.384 136.227,105.035 136.227,122.18
  other v1: 95.211,147.545 108.65,150.625

## Polygon pours and split planes (outlines as drawn)
no net on Internal Plane 1 (split plane): 150.29,76.71 51.31,76.71 51.31,155.69 150.29,155.69
no net on Internal Plane 2 (split plane): 150.29,76.71 51.31,76.71 51.31,155.69 150.29,155.69

## Keep-outs
Keep-Out Layer:
  lines w0.3: 53.6,84.181 56.586,81.195 146.611,81.195 149.011,83.595 149.011,150.378 146.769,152.62 146.453,152.62 56.095,152.62 53.6,150.125 53.6,84.181

## Other copper
Top Layer:
  text "-" at 107.45,112.7 h1.52
  text "+" at 107.425,106.65 h1.52
  text "Rst" at 54.65,103.7 h1.52
  text "+" at 70.725,102.65 h1.52
  text "Vcc" at 54.575,101.125 h1.52
  text "Gnd" at 54.5,98.7 h1.52
  text "miso" at 54.475,96.25 h1.52
  text "mosi" at 54.475,93.575 h1.52
  text "sck" at 54.575,91.125 h1.52

## Text inside footprints (layer, text, board x,y; h text height)
BT1: Top Overlay "CR2032" at 89.225,88.15 h1.52
Buzzer: Top Overlay "+" at 70.65,106.35 h1.52